# Altium PCB OSU_LVUP.PcbDoc
Units mil, origin at the board's own origin, x right, y up, seen from the top; angles counter-clockwise.
Board outline 2185.03 x 1485.02 mil, 2 copper layers (Top Layer, Bottom Layer); 47 components, 40 nets, 153 pads, 163 vias.
Unrouted connection lines stored in the file: 4.
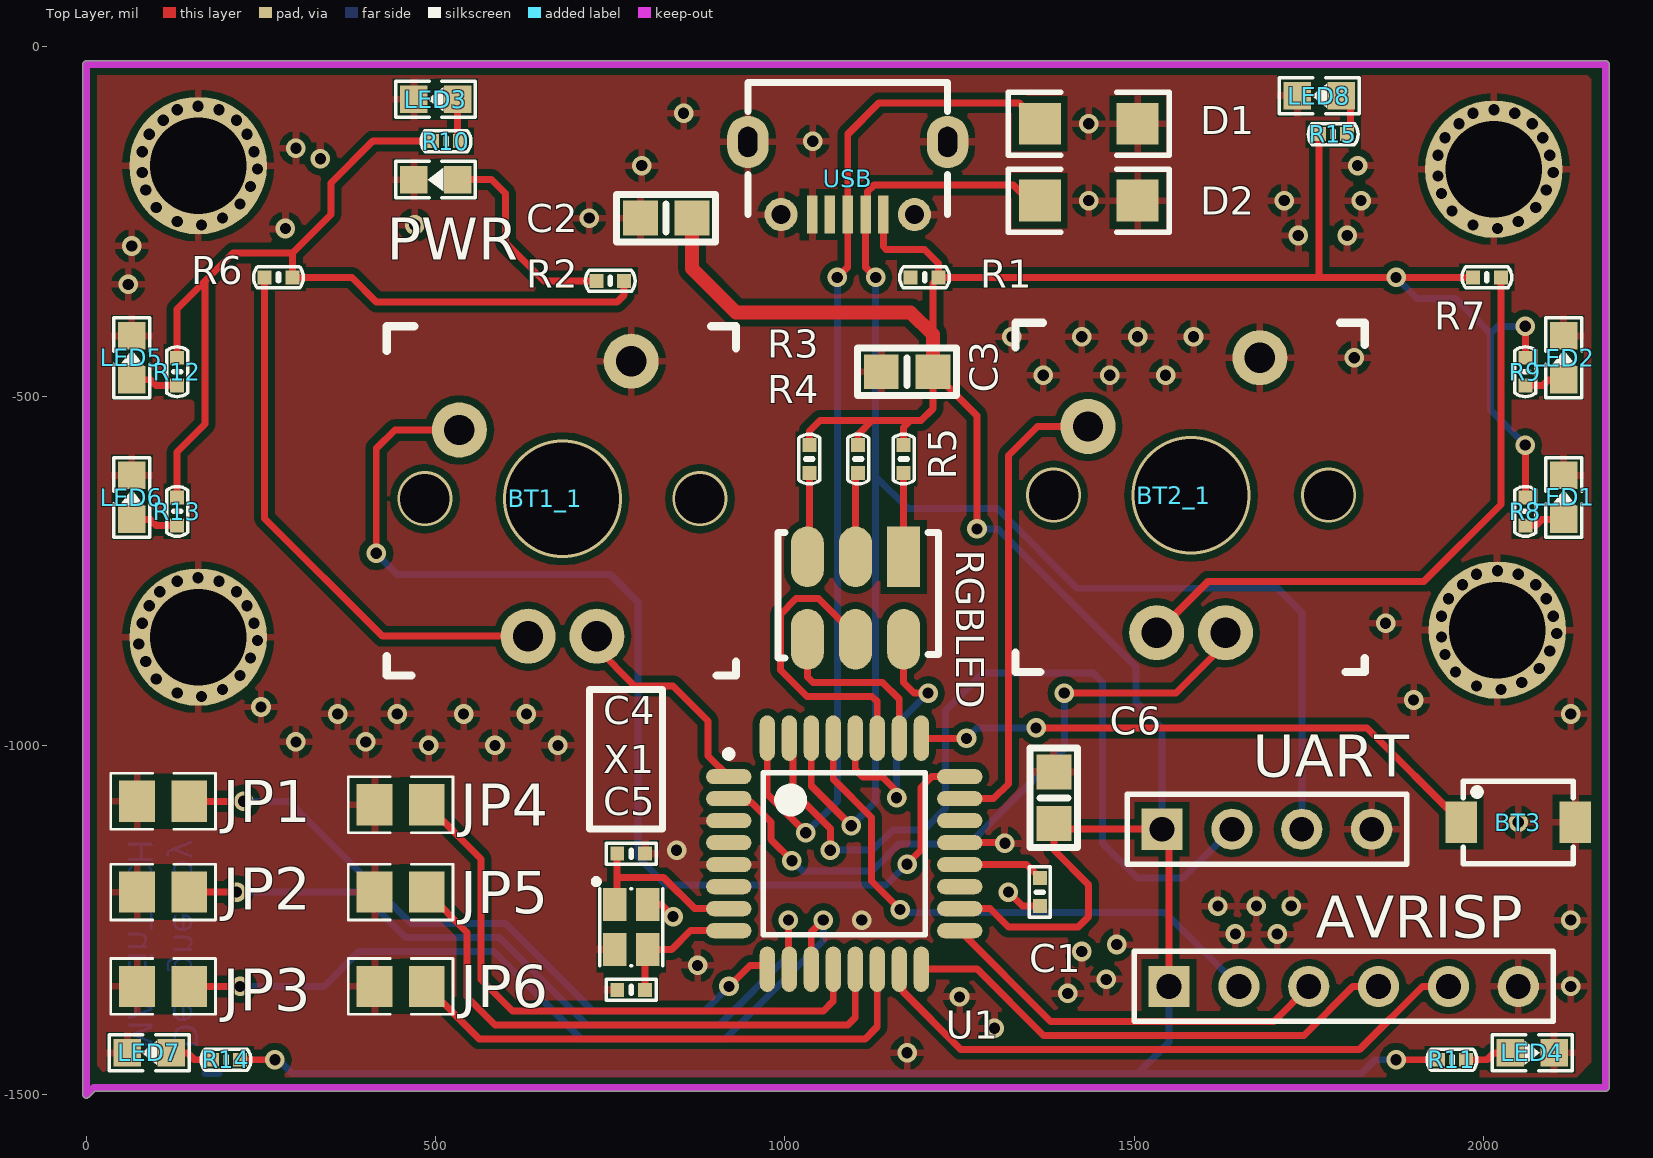
[diagram p0: Top Layer view]
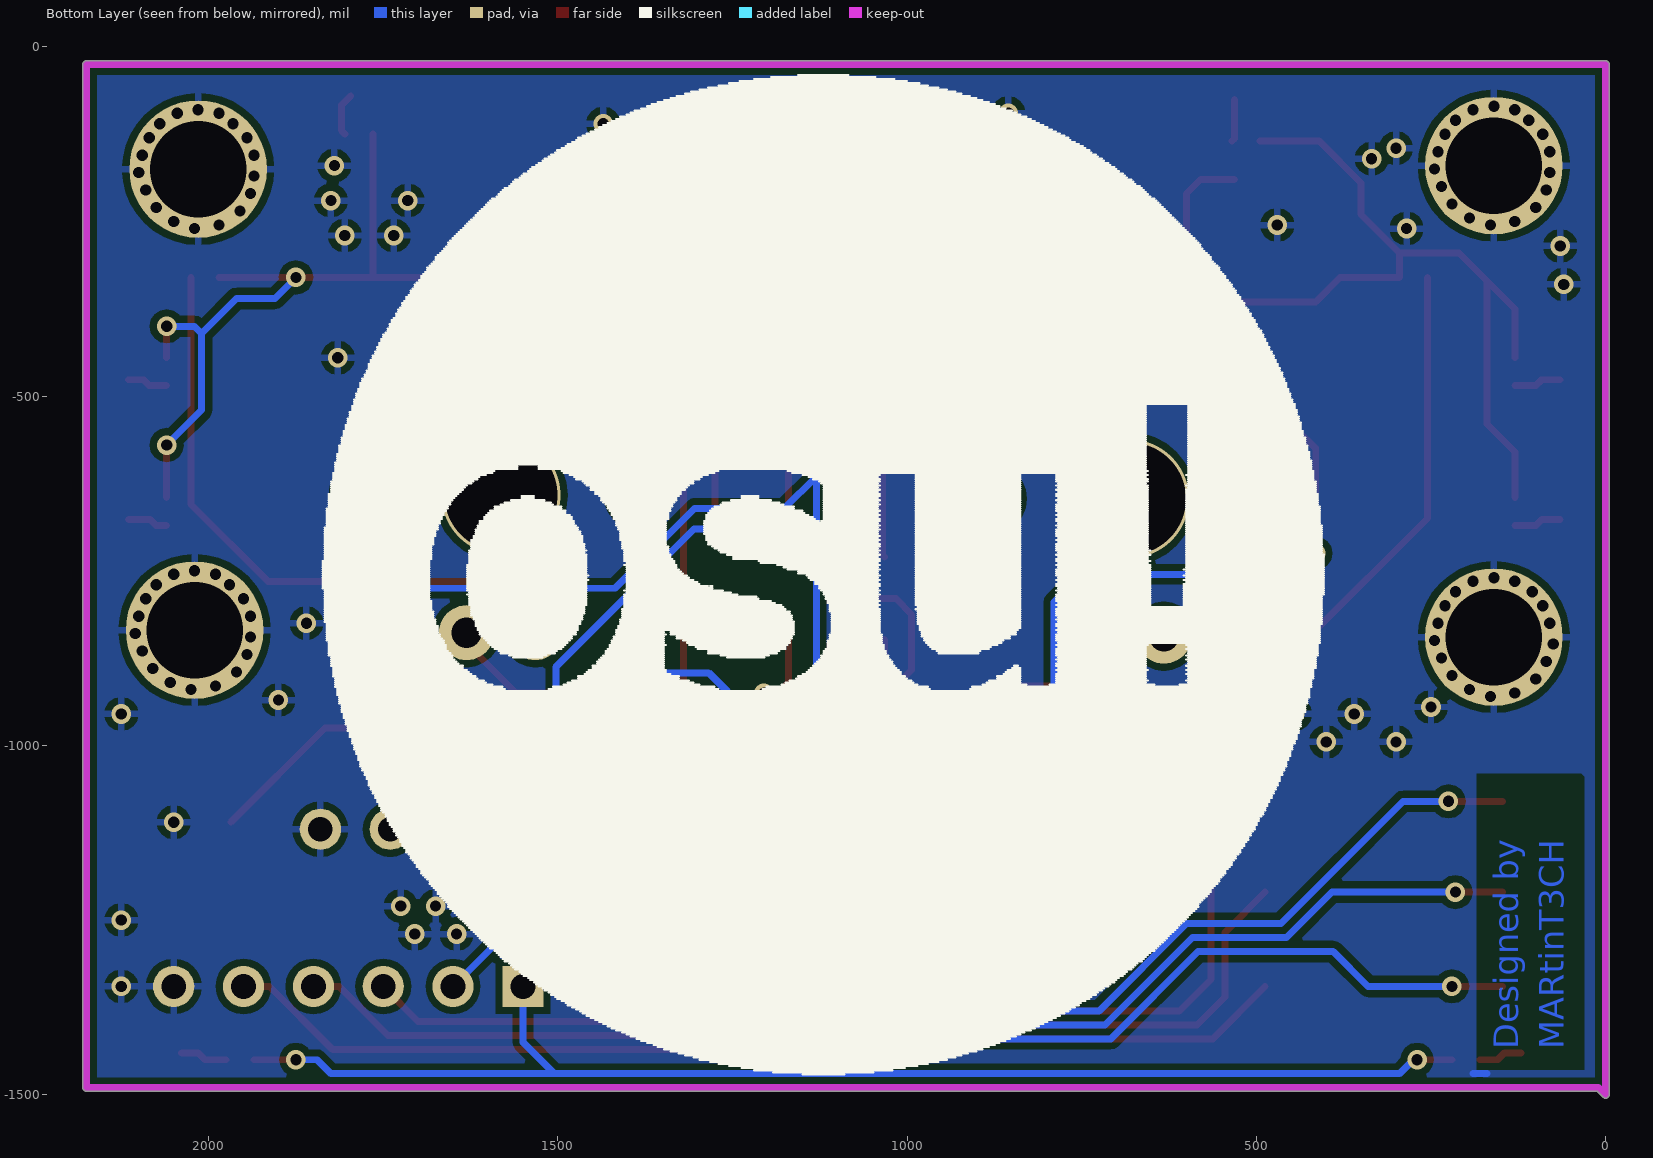
[diagram p1: Bottom Layer view, seen from below]
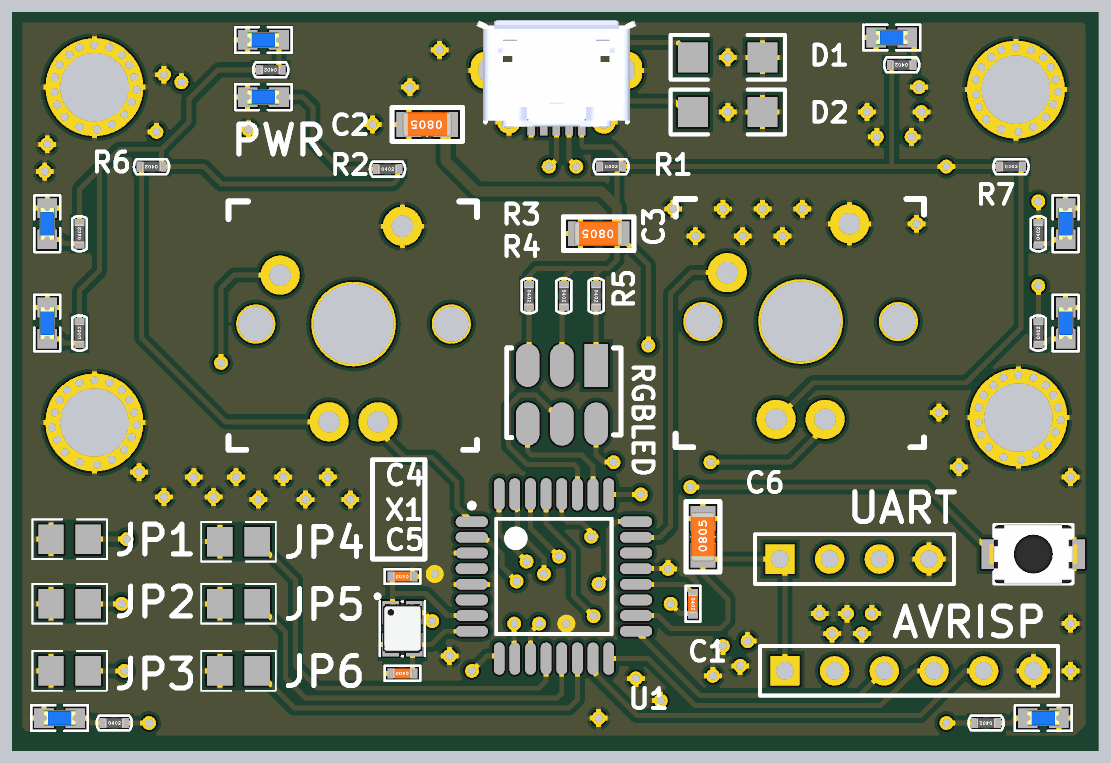
[diagram p2: 3D render of the assembled board from above, using the file's embedded part models]

## Layer stack, top to bottom
Top Solder: solder mask 0.4, Solder Resist, Dk 3.5
Top Layer: signal copper 1.4
Dielectric 1: dielectric 12.6, FR-4, Dk 4.8
Bottom Layer: signal copper 1.4
Bottom Solder: solder mask 0.4, Solder Resist, Dk 3.5

## Board outline
-5.01,-1500 -5.01,-25.07 cw(c0,-25) 0,-19.98 5,-19.98 cw(c5,-25) 5.07,-19.99 0.07,-19.99 ccw(c0,-25) 0,-19.98 0,-19.99 2175,-19.99 cw(c2175,-25) 2180.02,-25 2180.02,-1490 cw(c2175,-1490) 2175,-1495.01 12.08,-1495.01 3.55,-1503.55 3.56,-1503.53 cw(c0,-1500)

## Design rules (kind name [scope] priority, off if disabled: settings)
Clearance [All] p1: gap=10
PolygonConnect [All] p1: connectstyle=Relief reliefconductorwidth=10 reliefentries=4 polygonreliefangle="90 Angle" airgapwidth=10
RoomDefinition OSU_LVUP [InComponentClass('OSU_LVUP')] p1: confinementstyle=ConfineIn formatcopy=TRUE lockcomponents=FALSE outline 4280,-2860 12490,-2860 12490,-2140 4280,-2140
RoutingVias [All] p1: holewidth=28 width=50 viastyle="Through Hole" minholewidth=28 minwidth=50 maxholewidth=28 maxwidth=50
SolderMaskExpansion [All] p1: expansion=4
Width [All] p1: maxlimit=10 minlimit=10 preferedwidth=10
29 further rules are at their usual default settings.

## Components (designator, comment, footprint, x,y, rotation, side; value= is the part's Value field where it differs from the comment)
AVRISP "Header 6" HDR1X6 1550,-1345 r0 top (schematic designator P1)
BT1_1 "Cherry_MX" cherry_mx 780,-450 r0 top
BT2_1 "JiXieJianPian" cherry_mx 1680,-445 r0 top
BT3 "SW-PB" SMT_SW_PTS_820 2050,-1110 r0 top
C1 "100nF" SMT_C_0402 1365,-1210 r270 top
C2 "10uF" SMT_C_0805 830,-245 r180 top
C3 "0.1uF" SMT_C_0805 1175,-465 r180 top
C4 "22pF" SMT_C_0402 780,-1155 r180 top
C5 "22pF" SMT_C_0402 780,-1350 r180 top
C6 "0.1uF" SMT_C_0805 1385,-1075 r90 top
D1 "1N4729" 1206 1435,-110 r180 top
D2 "1N4729" 1206 1435,-220 r180 top
JP1 "JP2" 0805-1 110,-1080 r0 top
JP2 "JP2" 0805-1 110,-1210 r0 top
JP3 "JP2" 0805-1 110,-1345 r0 top
JP4 "JP2" 0805-1 450,-1085 r0 top
JP5 "JP2" 0805-1 450,-1210 r0 top
JP6 "JP2" 0805-1 450,-1345 r0 top
LED1 "BLUE" SMT_LED_0603 2115,-645 r90 top
LED2 "BLUE" SMT_LED_0603 2115,-445 r90 top
LED3 "BLUE" SMT_LED_0603 500,-75 r180 top
LED4 "BLUE" SMT_LED_0603 2070,-1440 r0 top
LED5 "BLUE" SMT_LED_0603 65,-445 r90 top
LED6 "BLUE" SMT_LED_0603 65,-645 r90 top
LED7 "BLUE" SMT_LED_0603 90,-1440 r180 top
LED8 "BLUE" SMT_LED_0603 1765,-70 r180 top
PWR "BLUE" SMT_LED_0603 500,-190 r180 top (schematic designator LED1)
R1 "1k" SMT_R_0402 1200,-330 r0 top
R2 "680" SMT_R_0402 750,-335 r0 top
R3 "270" SMT_R_0402 1035,-590 r270 top
R4 "270" SMT_R_0402 1105,-590 r270 top
R5 "270" SMT_R_0402 1170,-590 r270 top
R6 "470" SMT_R_0402 275,-330 r180 top
R7 "470" SMT_R_0402 2005,-330 r0 top
R8 "680" SMT_R_0402 2060,-665 r90 top
R9 "680" SMT_R_0402 2060,-465 r90 top
R10 "680" SMT_R_0402 515,-135 r180 top
R11 "680" SMT_R_0402 1955,-1450 r180 top
R12 "680" SMT_R_0402 130,-465 r90 top
R13 "680" SMT_R_0402 130,-665 r90 top
R14 "680" SMT_R_0402 200,-1450 r0 top
R15 "680" SMT_R_0402 1785,-125 r180 top
RGBLED "5050LED" LED5050 1170,-730 r270 top
U1 "ATmega8-16AI" 32A_N 1085,-1155 r0 top
UART "Header 4" HDR1X4 1540,-1120 r0 top (schematic designator P2)
USB "USB_Micro_5S_B" USB_MICRO_5S_B 1090,-240 r0 top
X1 "12MHz(2520/3225)" SMT_XTAL_2520 780,-1260 r270 top

## Footprints (in the part's own frame and the unit in brackets; to place one, negate y for a bottom-side part, rotate by r counter-clockwise, add the part's x,y. Pads: shape width x height; smd on the part's side, far side on the other; paste and mask are expansions set on the pad)
32A_N [mm] "Thin QFP, 32-Leads, Body 7x7mm, Pitch 0.8mm, IPC Medium Density"
  oval 1.65x0.55 smd: 1(-4.2,2.8) 2(-4.2,2) 3(-4.2,1.2) 4(-4.2,0.4) 5(-4.2,-0.4) 6(-4.2,-1.2) 7(-4.2,-2) 8(-4.2,-2.8) 17(4.2,-2.8) 18(4.2,-2) 19(4.2,-1.2) 20(4.2,-0.4) 21(4.2,0.4) 22(4.2,1.2) 23(4.2,2) 24(4.2,2.8)
  oval 0.55x1.65 smd: 9(-2.8,-4.2) 10(-2,-4.2) 11(-1.2,-4.2) 12(-0.4,-4.2) 13(0.4,-4.2) 14(1.2,-4.2) 15(2,-4.2) 16(2.8,-4.2) 25(2.8,4.2) 26(2,4.2) 27(1.2,4.2) 28(0.4,4.2) 29(-0.4,4.2) 30(-1.2,4.2) 31(-2,4.2) 32(-2.8,4.2)
  silkscreen extent -4.32,-2.95 2.95,3.75, body extent -3.5,-3.5 3.5,3.5, height 1.2
0805-1 [mm] "贴片带丝印"
  rect 1.3x1.5 smd: 1(-0.95,0) 2(0.95,0)
  silkscreen extent -1.91,-1.02 1.91,1.02, body extent -1.14,-0.51 1.14,0.51, height 1
1206 [mil] "贴片元件"
  rect 60x60 smd: 1(-70,0) 2(70,0)
  silkscreen extent -115,-45 115,45, body extent -75,-35 75,35, height 39
cherry_mx [mm]
  round 2 hole 1.1: 1(0,0) 2(-6.25,-2.5) 3(-3.75,-10) 4(-1.25,-10)
  silkscreen extent -8.89,-11.43 3.81,1.27
HDR1X4 [mm] "Connector; Header; 4 Position"
  rect 1.5x1.5 hole 0.9: 1(0,0)
  round 1.5 hole 0.9: 2(2.54,0) 3(5.08,0) 4(7.62,0)
  silkscreen extent -1.27,-1.27 8.89,1.27
HDR1X6 [mm] "Connector; Header; 6 Position"
  rect 1.5x1.5 hole 0.9: 1(0,0)
  round 1.5 hole 0.9: 2(2.54,0) 3(5.08,0) 4(7.62,0) 5(10.16,0) 6(12.7,0)
  silkscreen extent -1.27,-1.27 13.97,1.27
LED5050 [mm]
  rect 2.2x1.2 smd: 1(0,0)
  oval 2.2x1.2 smd: 2(0,-1.75) 3(0,-3.5) 4(3,-3.5) 5(3,-1.75) 6(3,0)
  silkscreen extent -0.89,-4.57 3.68,1.27
SMT_C_0402 [mil]
  rect 20x20 smd: 1(-20,0) 2(20,0)
  silkscreen extent -36,-15 36,15, body extent -20,-10 20,10, height 20
SMT_C_0805 [mil]
  rect 50x50 smd: 1(-37,0) 2(37,0)
  silkscreen extent -71,-34 71,34, body extent -49,-24 49,25, height 31
SMT_LED_0603 [mm]
  rect 1x1 smd: 1(-0.8,0) 2(0.8,0)
  silkscreen extent -1.45,-0.66 1.45,0.66, body extent -0.81,-0.4 0.81,0.4, height 0.6
SMT_R_0402 [mil]
  rect 20x20 smd: 1(-20,0) 2(20,0)
  silkscreen extent -36,-15 36,15, body extent -20,-10 20,10, height 20
SMT_SW_PTS_820 [mm]
  rect 1.143x1.5 smd: 1(-2.075,0) 2(2.075,0)
  round 0 all layers, no hole paste-2.54 mask-2.54: MH1(0,0.9) MH2(0,-0.9)
  silkscreen extent -2,-1.5 2,1.5, body extent -2.25,-1.55 2.25,1.55, height 2.05
SMT_XTAL_2520 [mm]
  rect 1.2x0.85 smd: 1(-0.813,-0.6) 2(0.813,-0.6) 3(0.813,0.6) 4(-0.813,0.6)
  silkscreen extent -1.75,-1.37 1.41,1.15, body extent -1.25,-1 1.25,1, height 0.79
USB_MICRO_5S_B [mil]
  rect 15x54 smd: 1(51,0) 2(25.5,0) 3(0,0) 4(-25.5,0) 5(-51,0)
  oval 59.06x74.8 hole 27.56 slot 43.31 at 90 deg: 6(-143,104) 7(143,104)
  round 47.24 hole 27.5: 8(95.5,0) 9(-95.5,0)
  silkscreen extent -143,0 143,189, body extent -161,-9 161,204, height 105

## Part data
AVRISP: "Header, 6-Pin"
BT1_1: library part JiXieJianPian
C1 C4 C5: library part SMT_C_0402, "Surface mount capacitor 0402"
C2 C3 C6: library part SMT_C_0805, "Surface mount capacitor 0805"
D1 D2: library part SMT_DIODE_SCHOTTKY_SOD_323, "Surface mount schottky diode SOD-323(0805) Package"
LED1 LED2 LED3 LED4 LED5 LED6 LED7 LED8 PWR: library part SMT_LED_0603, "SMT LED"
R1 R2 R3 R4 R5 R6 R7 R8 R9 R10 R11 R12 R13 R14 R15: library part SMT_R_0402, "Surface mount resistor 0402"
U1: "8-Bit AVR Microcontroller with 8K Bytes of In-System Programmable Flash Memory"
UART: "Header, 4-Pin"
USB: "USB micro female SMT with 4 fixed foot"
X1: library part SMT_XTAL_PASSIVE, "Passive crystal"

## Free pads (board coordinates)
  round 196.85 hole 137.8: 7(160,-845) 7(160,-170) 7(2015,-175) 7(2020,-835)

## Via types
v1: diameter 28, hole 16, Top Layer to Bottom Layer, 84 vias
v2: diameter 16, hole 16, Top Layer to Bottom Layer, 72 vias
v3: diameter 78.74, hole 70.87, Top Layer to Bottom Layer, 4 vias
v4: diameter 170, hole 161.42, Top Layer to Bottom Layer, 2 vias
v5: diameter 28, hole 16, Top Layer to Bottom Layer, tented bottom, 1 vias

## Nets (pads, with @x,y where several pads share a name; then routed paths per layer and width w, separated by ;. In a path a pad name is that pad's centre, name@x,y a point inside that pad or via, vN(x,y) a via of type N, cw(c..) or ccw(c..) an arc to the next point about the centre after c; other vN are vias at no path point)
BT1: BT1_1.2 U1.24 | length 1642.9
  Top Layer w10: v1(415,-725) 415,-575 441.57,-548.43 BT1_1.2 ; v1(1175,-1170) 1195,-1150 1195,-1060 1210.24,-1044.76 U1.24
  Bottom Layer w10: v1(415,-725) 445,-755 750,-755 790,-795 790,-1160 830,-1200 1145,-1200 v1(1175,-1170)
BT2: BT2_1.2 U1.23 | length 681.8
  Top Layer w10: U1.23 1298.74,-1076.26 1320,-1055 1320,-585 1361.57,-543.43 BT2_1.2 ; BT2_1.2@1458.94,-543.43 BT2_1.2@1460.51,-541.85
BT3: BT3.1 U1.25 | length 835.3
  Top Layer w10: U1.25 1195.59,-990 v1(1260,-990) ; v1(1359.65,-975) 1833.31,-975 BT3.1
  Bottom Layer w10: v1(1260,-990) 1275,-975 v1(1359.65,-975)
D+: D1.2 U1.32 USB.3 | length 1492.1
  Top Layer w10: U1.32 974.76,-1069.76 v1(1030,-1125) ; v1@1065,-330 v1(1075,-330) 1090,-315 USB.3 1090,-125 1135,-80 1335,-80 D1.2
  Bottom Layer w10: v1@1035,-1120 1075,-1080 v1(1075,-330)
D-: D2.2 R1.1 U1.30 UART.3 USB.2 | length 2339
  Top Layer w10: U1.30 1037.76,-1057.76 v1(1095,-1115) ; v1(1130,-330) 1115.5,-315.5 USB.2 1118.5,-237 1118.5,-206.79 1127.29,-198 1327,-198 1349,-220 D2.2
  Bottom Layer w10: v1(1095,-1115) 1130,-1080 1130,-615 ; v1(1130,-330) 1130,-615 ; UART.3 1740,-810 1705,-775 1418.28,-775 1304.28,-661 1176,-661 1130,-615
GND: AVRISP.6 BT1_1.1 BT2_1.1 BT3.2 C1.2 C2.2 C3.2 C4.1 C5.2 C6.2 D1.1 D2.1 JP1.1 JP2.1 JP3.1 JP4.1 JP5.1 JP6.1 LED1.2 LED2.2 LED3.2 LED4.2 LED5.2 LED6.2 LED7.2 LED8.2 pad.7 PWR.2 U1.3 U1.5 U1.21 UART.4 USB.5 USB.6 USB.7 USB.8 USB.9 X1.2 X1.4 | length 181.7
  Top Layer w10: X1.4 823.01,-1228.01 v1(840,-1245) ; U1.21 1314.25,-1139.25 v1(1315,-1140) ; v1(1320,-1210) 1340,-1230 C1.2
  Bottom Layer w10: 170,-1470 190,-1470
  other v1: 1175,-1440 1300,-1405 1250,-1360 1405,-1355 2125,-1345 1460,-1335 875,-1315 1425,-1295 1475,-1285 1645,-1270 1705,-1270 1110,-1250 2125,-1250 1620,-1230 1675,-1230 1725,-1230 845,-1150 2050,-1110 490,-1000 585,-1000 675,-1000 300,-995 400,-995 360,-955 445,-955 540,-955 630,-955 2125,-955 250,-945 1900,-935 1860,-825 1370,-470 1465,-470 1545,-470 1815,-445 1325,-415 1425,-415 1505,-415 1585,-415 60,-340 65,-285 1735,-270 1805,-270 285,-260 470,-255 720,-245 1435,-220 1715,-220 1825,-220 795,-170 1820,-170 335,-160 300,-145 1040,-135 1435,-110 855,-95
  other v2: 165,-930 130,-925 195,-920 2025,-920 1990,-915 2055,-910 100,-905 220,-900 1960,-895 2080,-890 85,-880 235,-875 1945,-870 2095,-865 75,-855 245,-850 1940,-845 2105,-840 80,-825 240,-825 1940,-815 2100,-815 90,-800 230,-800 1950,-790 2090,-790 105,-780 215,-780 1970,-770 2075,-770 130,-765 190,-765 160,-760 1990,-755 2050,-755 2020,-750 2020,-260 165,-255 1985,-255 130,-250 2050,-250 195,-245 1955,-235 100,-230 2075,-230 220,-225 1940,-210 85,-205 2090,-205 235,-200 1935,-185 80,-180 2100,-180 245,-175 1935,-155 2095,-155 80,-150 240,-150 1945,-130 2085,-130 90,-125 230,-125 1965,-110 2070,-110 110,-105 215,-105 1985,-95 2045,-95 130,-90 190,-90 2015,-90 160,-85
KEY_LED1: BT1_1.4 U1.1 | length 311.5
  Top Layer w10: BT1_1.4 730.79,-860.79 785,-915 840,-915 890,-965 890,-1015.12 U1.1
KEY_LED2: BT2_1.4 U1.2 | length 966.7
  Top Layer w10: U1.2 925.32,-1081.93 952,-1081.93 980,-1109.93 980,-1135 v1(1010,-1165) ; v1(1400,-925) 1560,-925 1630.79,-854.21 BT2_1.4
  Bottom Layer w10: v1(1010,-1165) 1025,-1180 1125,-1180 1146,-1159 1146,-1157.99 1162.99,-1141 1264,-1141 1400,-1005 v1(1400,-925)
MISO: AVRISP.4 U1.16 | length 723
  Top Layer w10: U1.16 1275.35,-1320.35 1370,-1415 1742.97,-1415 1812.97,-1345 AVRISP.4
MOSI: AVRISP.5 U1.15 | length 884.7
  Top Layer w10: U1.15@1169.41,-1320 1169.41,-1352.71 1251.7,-1435 1822.97,-1435 1912.97,-1345 AVRISP.5
NetBT1_1_3: BT1_1.3 R6.2 | length 792.2
  Top Layer w10: R6.2 255,-675 423.7,-843.7 BT1_1.3
NetBT2_1_3: BT2_1.3 R7.2 | length 893.7
  Top Layer w10: BT2_1.3 1606.06,-765 1915,-765 2025,-655 R7.2
NetC1_1: C1.1 U1.20 | length 122.6
  Top Layer w10: U1.20 1345.75,-1170.75 C1.1
NetLED1_1: LED1.1 R8.1 | length 58.5
  Top Layer w10: R8.1 2075,-685 2083.5,-676.5 LED1.1
NetLED2_1: LED2.1 R9.1 | length 58.5
  Top Layer w10: R9.1 2085,-485 2093.5,-476.5 LED2.1
NetLED3_1: LED3.1 R10.1 | length 61.5
  Top Layer w10: LED3.1 531.5,-131.5 R10.1
NetLED4_1: LED4.1 R11.1 | length 67.6
  Top Layer w10: R11.1 2005,-1450 2015,-1440 LED4.1
NetLED5_1: LED5.1 R12.1 | length 68.5
  Top Layer w10: LED5.1 91.5,-476.5 100,-485 R12.1
NetLED6_1: LED6.1 R13.1 | length 68.5
  Top Layer w10: LED6.1 91.5,-676.5 100,-685 R13.1
NetLED7_1: LED7.1 R14.1 | length 62.6
  Top Layer w10: LED7.1 145,-1440 155,-1450 R14.1
NetLED8_1: LED8.1 R15.1 | length 62.7
  Top Layer w10: LED8.1 1810,-83.5 1810,-120 R15.1
NetPWR_1: PWR.1 R2.1 | length 299.6
  Top Layer w10: PWR.1 580,-190 600,-210 600,-280 655,-335 R2.1
NetR3_2: R3.2 RGBLED.3 | length 121.2
  Top Layer w10: RGBLED.3 1035,-727.2 R3.2
NetR4_2: R4.2 RGBLED.2 | length 121.6
  Top Layer w10: RGBLED.2 1101.1,-613.9 R4.2
NetR5_2: R5.2 RGBLED.1 | length 120
  Top Layer w10: RGBLED.1 R5.2
RGBLED_1: RGBLED.4 U1.26 | length 254.6
  Top Layer w10: RGBLED.4 1032.2,-902.2 1040,-910 1140,-910 1163.74,-933.74 U1.26
RGBLED_2: RGBLED.5 U1.27 | length 433.5
  Top Layer w10: RGBLED.5 1101.1,-842.7 1048.2,-789.8 1016.21,-789.8 993.58,-812.43 993.58,-891.87 1031.72,-930 1125,-930 1132.24,-937.24 U1.27
RGBLED_3: RGBLED.6 U1.28 | length 399.6
  Top Layer w10: U1.28 1100.75,-1034.25 1111.5,-1045 1140,-1045 v1@1170,-1075 ; RGBLED.6 1170,-910 1185,-925 v1(1205,-925)
  Bottom Layer w10: v1@1165,-1070 1160,-1065 1160,-970 v1(1205,-925)
  other v1: 1160,-1075
RST: AVRISP.2 U1.29 | length 815.6
  Top Layer w10: U1.29 1069.25,-1048.24 1124,-1102.99 1124,-1194 v1(1165,-1235)
  Bottom Layer w10: v1(1165,-1235) 1169,-1239 1544,-1239 AVRISP.2
SCK: AVRISP.3 U1.17 | length 574.1
  Top Layer w10: U1.17 1380.12,-1395 1700,-1395 AVRISP.3
SET_JP1: JP1.2 U1.9 | length 980.8
  Top Layer w10: JP1.2 v1(225,-1080) ; v1(920,-1345) 950,-1315 969.41,-1315 U1.9
  Bottom Layer w10: v1(225,-1080) 290,-1080 465,-1255 600,-1255 725,-1380 885,-1380 v1(920,-1345)
SET_JP2: JP2.2 U1.10 | length 1099.2
  Top Layer w10: JP2.2 v1(215,-1210) ; v1(1005,-1250) 1005,-1319.09 U1.10
  Bottom Layer w10: v1(215,-1210) 391.72,-1210 456.72,-1275 591.72,-1275 716.72,-1400 906.01,-1400 1005,-1301.01 v1(1005,-1250)
SET_JP3: JP3.2 U1.11 | length 1145.2
  Top Layer w10: JP3.2 v1(220,-1345) ; U1.11 1037.76,-1267.24 v1(1055,-1250)
  Bottom Layer w10: v1(220,-1345) 340,-1345 390,-1295 583.43,-1295 708.43,-1420 914.3,-1420 1055,-1279.3 v1(1055,-1250)
SET_JP4: JP4.2 U1.12 | length 856.3
  Top Layer w10: JP4.2 565,-1162.6 565,-1335 610,-1380 1055,-1380 1069.25,-1365.75 U1.12
SET_JP5: JP5.2 U1.13 | length 819.5
  Top Layer w10: JP5.2 545,-1267.6 545,-1360 585,-1400 1090,-1400 1100.75,-1389.25 U1.13
SET_JP6: JP6.2 U1.14 | length 765.5
  Top Layer w10: JP6.2 562.4,-1420 1115,-1420 1132.24,-1402.76 U1.14
TXD: U1.31 UART.2 | length 1222.4
  Top Layer w10: U1.31 1011.93,-995.31 1011.93,-1065.92 1065,-1118.99 v1@1065,-1140
  Bottom Layer w10: v1(1065,-1150) 1125.7,-1150 1154.7,-1121 1199,-1121 1230,-1090 1230,-950 1284,-896 1441,-896 1455,-910 1455,-1140 1505,-1190 1570,-1190 UART.2
VCC: AVRISP.1 C2.1 C3.1 C6.1 R1.2 R2.2 R3.1 R4.1 R5.1 R6.1 R7.1 R8.2 R9.2 R10.2 R11.2 R12.2 R13.2 R14.2 R15.2 U1.4 U1.6 U1.18 UART.1 USB.1 | length 7450.8
  Top Layer w10: R13.2 130,-580 170,-540 170,-335 ; R12.2 130,-375 170,-335 ; R14.2 v1(270,-1450) ; R10.2 410,-135 350,-195 350,-240 295,-295 ; R2.2 770,-355 760,-365 415,-365 380,-330 R6.1 295,-295 ; R3.1 1035,-550 1050,-535 1125,-535 ; R4.1 1105,-555 1125,-535 ; USB.1 1141,-286 1145,-290 1200,-290 1220,-310 R1.2 ; R5.1 1170,-545 1180,-535 ; 1212,-412 1212,-338 R1.2 ; U1.18 1293.74,-1233.74 1320,-1260 1420,-1260 1435,-1245 1435,-1200 1385,-1150 C6.1 1393,-1120 UART.1 1550,-1130 AVRISP.1 ; v1(1275,-690) 1275,-528 C3.1 1212,-518 1195,-535 1180,-535 ; R15.2 1765,-330 ; v5(1875,-1450) R11.2 ; R7.1 v1(1875,-330) 1765,-330 ; R8.2 v1(2060,-570) ; R9.2 v1(2060,-400) ; 170,-335 210,-295 295,-295 ; 1125,-535 1180,-535 ; R1.2 1765,-330
  Top Layer w20: C2.1 867,-317 930,-380 1180,-380 1212,-412 C3.1
  Bottom Layer w10: v1(270,-1450) 275,-1450 295,-1470 1505,-1470 ; v1(1275,-690) 1305,-690 1502.99,-887.99 1502.99,-937.99 1540,-975 UART.1 ; AVRISP.1 1550,-1425 1505,-1470 ; v5(1875,-1450) 1845,-1450 1825,-1470 1505,-1470 ; v1(1875,-330) 1905,-360 1960,-360 2010,-410 ; v1(2060,-570) 2010,-520 2010,-410 ; v1(2060,-400) 2020,-400 2010,-410
XTAL1: C4.2 U1.7 X1.1 | length 242.8
  Top Layer w10: X1.1 760,-1224.39 760,-1190 ; C4.2@760,-1165 760,-1190 ; U1.7 870.92,-1233.74 826.57,-1189.39 760.61,-1189.39 760,-1190
XTAL2: C5.1 U1.8 X1.3 | length 186.6
  Top Layer w10: C5.1 800,-1295.61 X1.3 838.01,-1291.99 864.76,-1265.24 U1.8
pads on no net: BT3.MH1 BT3.MH2 U1.19 U1.22 USB.4
copper on no net:
  other v3: 484.72,-646.85 878.43,-646.85 1384.72,-641.85 1778.43,-641.85
  other v4: 681.57,-646.85 1581.57,-641.85

## Polygon pours and split planes (outlines as drawn)
GND on Top Layer "Top Overlay-No Net" (solid, remove dead copper, pour order 5): -255,380 -255,-1970 -340,-2055 -95,-1810 2475,-1810 2475,-85 2400,-10
GND on Top Layer "Top Overlay-No Net" (solid, remove dead copper, pour order 6): 760,-1210 775,-1225 775,-1400 1065,-1400 1070,-1395 1075,-1390 1075,-1190
GND on Top Layer "Top Overlay-No Net" (solid, remove dead copper, pour order 8): 810,-1140 695,-1255 695,-1305 745,-1305 825,-1385 880,-1440 1065,-1440 1390,-1440 1405,-1455 1534.93,-1325.07 1615.47,-1325.07 1615.47,-1136.01 1579.53,-1100.07 1534.46,-1055 1360,-1055 979.28,-1055 949.43,-1025.15
GND on Bottom Layer "Top Overlay-No Net" (solid, remove dead copper, pour order 6): 2385,175 2460,100 2460,-1810 430,-1810 185,-1565 185,-1040 35,-1040 30,-1045 30,-1465 185,-1465 50,-1600 -20,-1600 -20,105 -65,150

## Keep-outs
Keep-Out Layer:
  lines w10: 5,-25 0,-25 ; 0,-25 0,-25 ; 0,-25 2175,-25 2175,-1490 10,-1490 0,-1500 0,-25 ; 0,-25 0,-25

## Other copper
Bottom Layer:
  text "MARtinT3CH" at 60,-1435 h35 r270
  text "Designed by" at 125,-1435 h35 r270

## Silkscreen, mask and mechanical layers (free items; w line width, h text height)
Top Overlay:
  lines w10: 720,-1120 720,-920 825,-920 825,-1120 720,-1120
Bottom Overlay:
  drawing of 1110 lines, arcs and shapes, not listed
Bottom Solder:
  rectangle: 35,-1465 185,-1040